# Altium PCB PCB1.PcbDoc
Units mm, origin at the board's own origin, x right, y up, seen from the top; angles counter-clockwise.
Board outline 25 x 60 mm, 2 copper layers (Top Layer, Bottom Layer), stack 1.071 mm thick; 45 components, 58 nets, 174 pads, 420 vias.
Unrouted connection lines stored in the file: 2.
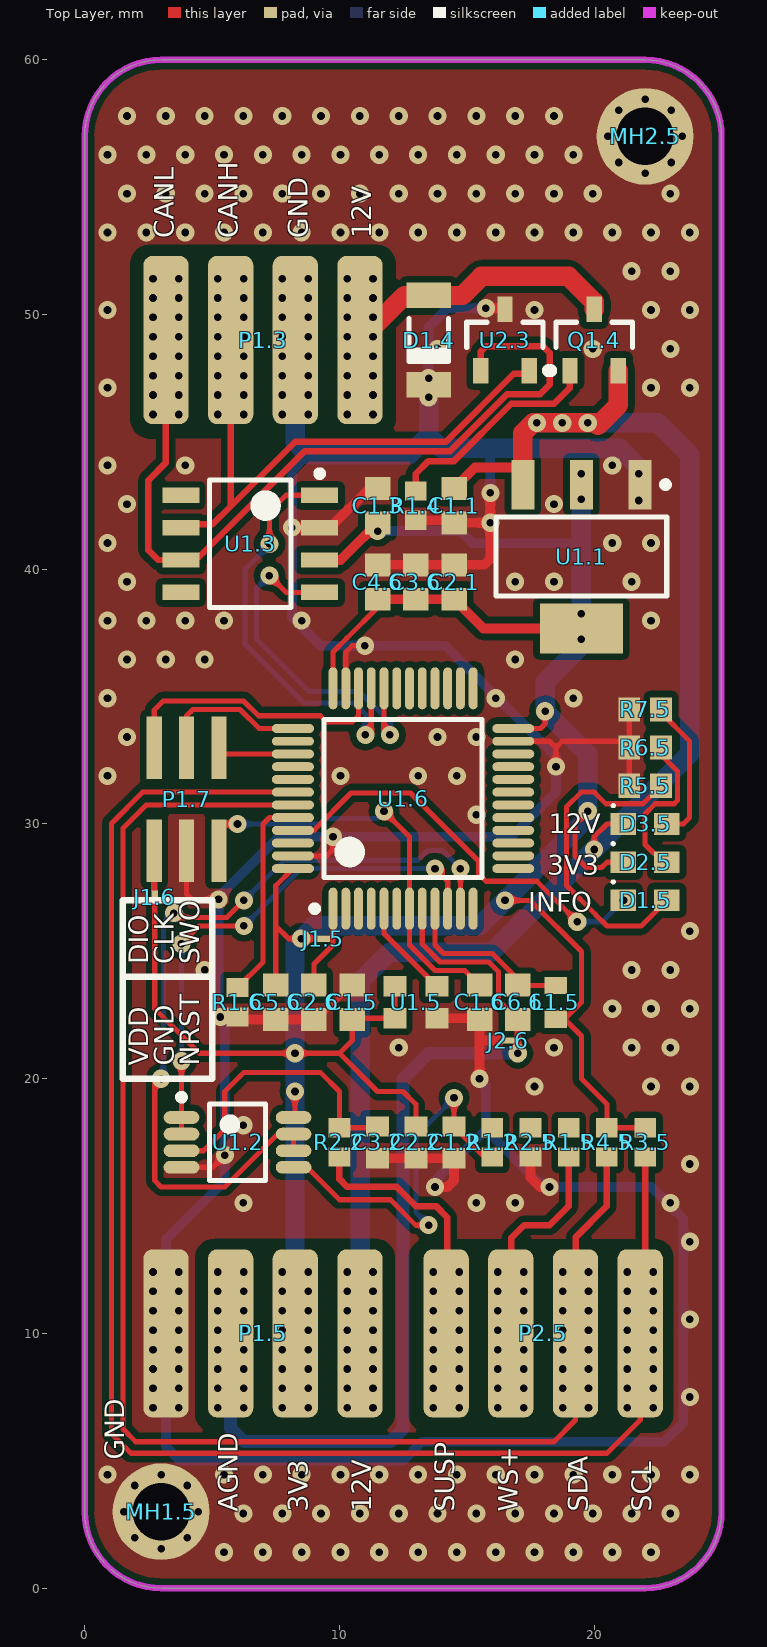
[diagram p0: Top Layer view]
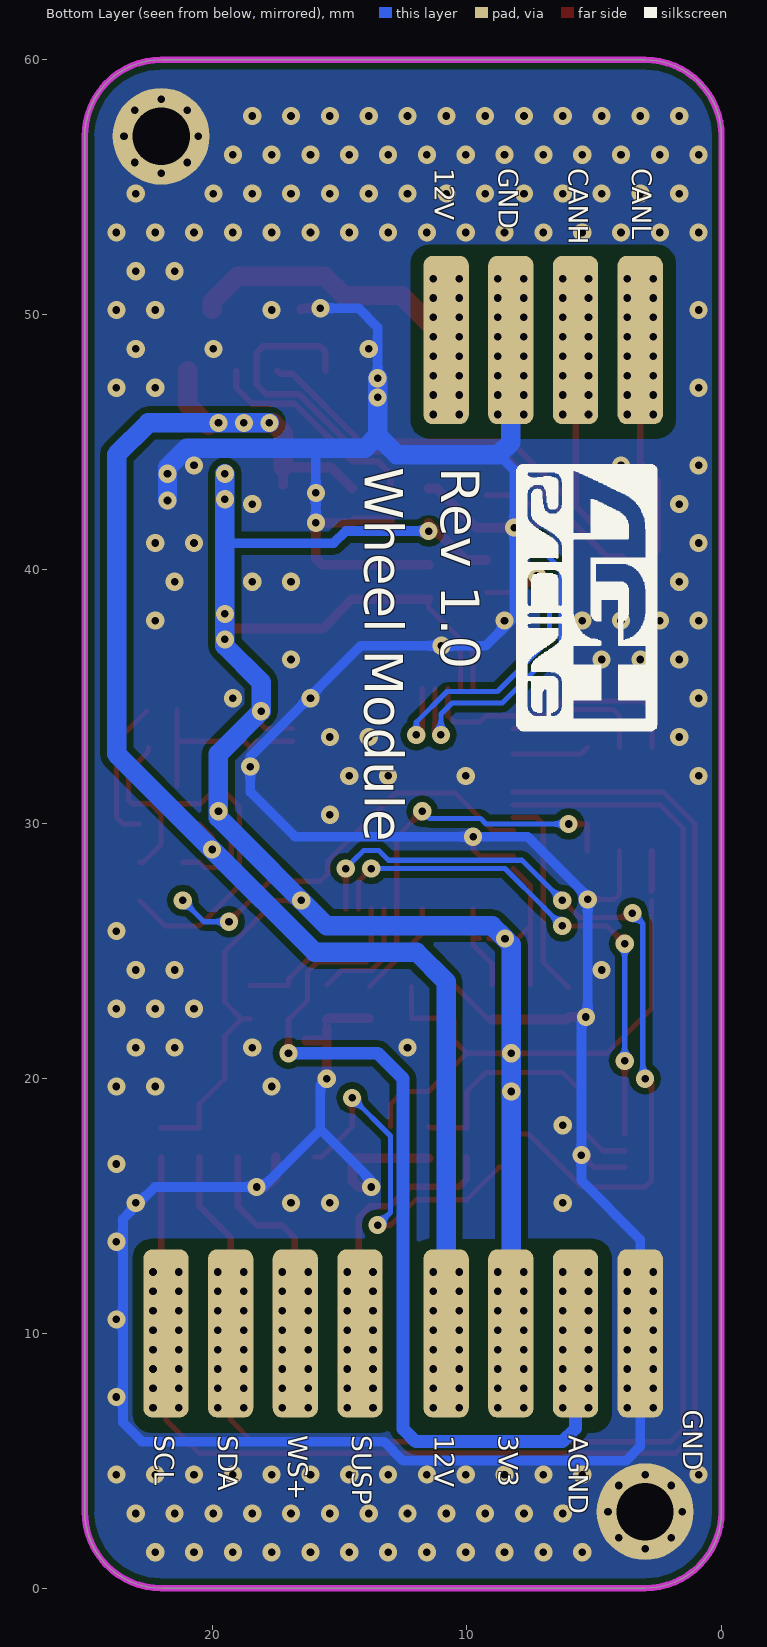
[diagram p1: Bottom Layer view, seen from below]

## Layer stack, top to bottom
Top Solder: solder mask 0.0102, Solder Resist, Dk 3.5
Top Layer: signal copper 0.0356
Dielectric 1: dielectric 1, FR-4, Dk 4.8
Bottom Layer: signal copper 0.0356
Bottom Solder: solder mask 0.0102, Solder Resist, Dk 3.5

## Board outline
0,3 0,57 cw(c3,57) 3,60 22,60 cw(c22,57) 25,57 25,3 cw(c22,3) 22,0 3,0 cw(c3,3)

## Design rules (kind name [scope] priority, off if disabled: settings)
Clearance [All] p1: gap=0.254 ignorepadtopadclearanceinfootprint=FALSE except(0: Arc-Hole Track-Hole SMDPad-Hole THPad-Hole Via-Hole Fill-Hole Poly-Hole Region-Hole Text-Hole; 0.127: Arc-Arc Arc-Track Arc-SMDPad Track-Track Track-SMDPad SMDPad-SMDPad)
MinimumSolderMaskSliver [All] p1: minsoldermaskwidth=0.178
PolygonConnect [Not (HasFootprint('MOUNTING HOLE 2mm') or HasFootprint('MOUNTING HOLE 3mm') or IsVia)] p1: connectstyle=Direct reliefconductorwidth=0.254 reliefentries=4 polygonreliefangle="90 Angle" airgapwidth=0.254
PolygonConnect PolygonConnect_Via [IsVia] p2: connectstyle=Direct reliefconductorwidth=0.254 reliefentries=4 polygonreliefangle="90 Angle" airgapwidth=0.254
PolygonConnect PolygonConnect_MH [HasFootprint('MOUNTING HOLE 2mm') or HasFootprint('MOUNTING HOLE 3mm')] p3: connectstyle=Direct reliefconductorwidth=0.254 reliefentries=4 polygonreliefangle="90 Angle" airgapwidth=0.254
RoutingVias [All] p1: holewidth=0.711 width=1.27 viastyle="Through Hole" minholewidth=0.711 minwidth=1.27 maxholewidth=0.711 maxwidth=1.27 useviatemplates=TRUE viatemplateguid#1={EA7F9BFE-1447-44E4-8BA2-E024834966B7} viatemplateguid#2={962B0548-01BA-4372-896D-C7EEA2AE57FF} viatemplateguid#3={9189B235-EEB6-45A3-9B67-93E09FAE2D0F} viatemplateguid#4={5D0A9815-DD85-4F1D-8D04-4794055170EA} viatemplateguid#5={E4E99652-BE81-42BB-9E36-7D36F875079A} viatemplatename#1=v71h30m0mx0 viatemplatename#2=v71h30m71 viatemplatename#3=v71h30m71 viatemplatename#4=v102h50m0mx0 viatemplatename#5=v127h70
SilkToSilkClearance [All] p1: silktosilkclearance=0.178
SolderMaskExpansion [All] p1: expansion=0.127
Width Width_POWER [InNetClass('POWER')] p1: maxlimit=0.762 minlimit=0.203 preferedwidth=0.381 minimp=50.000000 maximp=50.000000 favimp=50.000000
Width [Not InNetClass('POWER')] p2: maxlimit=0.508 minlimit=0.203 preferedwidth=0.254 minimp=50.000000 maximp=50.000000 favimp=50.000000
28 further rules are at their usual default settings.

## Classes and differential pairs
component class Main: C1.5 D1.5 D2.5 D3.5 J1.5 L1.5 MH1.5 MH2.5 P1.5 P2.5 R1.5 R2.5 R3.5 R4.5 R5.5 R6.5 R7.5 U1.5
component class "U_3V3 LD1117S33TR": C1.1 C2.1 U1.1
component class "U_Analog Input": C1.2 C2.2 C3.2 R1.2 R2.2 U1.2
component class "U_CAN Transceiver SN65HVD232D": C1.3 P1.3 U1.3 U2.3
component class "U_Input Protection": D1.4 Q1.4 R1.4
component class U_STM32F303CCT6: C1.6 C2.6 C3.6 C4.6 C5.6 C6.6 J1.6 J2.6 R1.6 U1.6
component class "U_SWD Connector": P1.7
net class PA[0..10]: PA0 PA1 PA2 PA3 PA4 PA5 PA6 PA7 PA8 PA9 PA10
net class PB[0..15]: PB0 PB1 PB2 PB4 PB5 PB6 PB7 PB8 PB9 PB10 PB11 PB12 PB13 PB14 PB15
net class PC[13..15]: PC13 PC14 PC15
net class POWER: GND VCC VCC_SAFE VDD

## Components (designator, comment, footprint, x,y, rotation, side; value= is the part's Value field where it differs from the comment)
C1.1 "Cap" CAP_0603_IPC_MD 14.5,42.5 r90 top value=10uF (schematic designator C1)
C1.2 "Cap" CAP_0603_IPC_HD 14.5,17.5 r90 top value=33n (schematic designator C1)
C1.3 "Cap" CAP_0603_IPC_MD 11.5,42.5 r270 top value=100nF (schematic designator C1)
C1.5 "Cap" CAP_0603_IPC_MD 10.5,23 r270 top value=100nF (schematic designator C1)
C1.6 "Cap" CAP_0603_IPC_MD 15.5,23 r90 top value=100nF (schematic designator C1)
C2.1 "Cap" CAP_0603_IPC_MD 14.5,39.5 r270 top value=10uF (schematic designator C2)
C2.2 "Cap" CAP_0603_IPC_HD 13,17.5 r90 top value=100nF (schematic designator C2)
C2.6 "Cap" CAP_0603_IPC_MD 9,23 r90 top value=100nF (schematic designator C2)
C3.2 "Cap" CAP_0603_IPC_HD 11.5,17.5 r90 top value=33n (schematic designator C3)
C3.6 "Cap" CAP_0603_IPC_MD 13,39.5 r270 top value=100nF (schematic designator C3)
C4.6 "Cap" CAP_0603_IPC_MD 11.5,39.5 r270 top value=100nF (schematic designator C4)
C5.6 "Cap" CAP_0603_IPC_MD 7.5,23 r90 top value=100nF (schematic designator C5)
C6.6 "Cap" CAP_0603_IPC_MD 17,23 r90 top value=100nF (schematic designator C6)
D1.4 "TGL34-20CA" DIO_MELF_IPC_MD 13.5,49 r90 top (schematic designator D1)
D1.5 "LED GREEN" LED_0603_GREEN_IPC_MD 22,27 r0 top (schematic designator D1)
D2.5 "LED RED" LED_0603_RED_IPC_MD 22,28.5 r0 top (schematic designator D2)
D3.5 "LED YELLOW" LED_0603_YELLOW_IPC_MD 22,30 r0 top (schematic designator D3)
J1.5 "NetTie" NETTIE 9.373,25.5 r0 top net-tie (schematic designator J1)
J1.6 "NetTie" NETTIE 2.75,27.127 r90 top net-tie (schematic designator J1)
J2.6 "NetTie" NETTIE 16.623,21.5 r180 top net-tie (schematic designator J2)
L1.5 "Ind" IND_0603_IPC_HD 18.5,23 r90 top value=10uH (schematic designator L1)
MH1.5 "Mounting Hole 2mm" "MOUNTING HOLE 2mm" 3,3 r90 top (schematic designator MH1)
MH2.5 "Mounting Hole 2mm" "MOUNTING HOLE 2mm" 22,57 r90 top (schematic designator MH2)
P1.3 "CAN" WIRE_PADS_4 7,49 r180 top (schematic designator P1)
P1.5 "SUPPLY" WIRE_PADS_4 7,10 r180 top (schematic designator P1)
P1.7 "SWD" HEADER_2x3_1_27_MALE_SMD 2.73,28.95 r90 top (schematic designator P1)
P2.5 "SENSORS" WIRE_PADS_4 18,10 r180 top (schematic designator P2)
Q1.4 "ZXMP3A13FTA" SOT23_IPC_MD#1 20,49 r90 top (schematic designator Q1)
R1.2 "Res" RES_0603_IPC_HD 16,17.5 r90 top value=10k (schematic designator R1)
R1.4 "Res" RES_0603_IPC_HD 13,42.5 r270 top value=1k (schematic designator R1)
R1.5 "Res" RES_0603_IPC_HD 19,17.5 r90 top value=4.7k (schematic designator R1)
R1.6 "Res" RES_0603_IPC_HD 6,23 r90 top value=10k (schematic designator R1)
R2.2 "Res" RES_0603_IPC_HD 10,17.5 r270 top value=10k (schematic designator R2)
R2.5 "Res" RES_0603_IPC_HD 17.5,17.5 r90 top value=1k (schematic designator R2)
R3.5 "Res" RES_0603_IPC_HD 22,17.5 r90 top value=10k (schematic designator R3)
R4.5 "Res" RES_0603_IPC_HD 20.5,17.5 r90 top value=10k (schematic designator R4)
R5.5 "Res" RES_0603_IPC_MD 22,31.5 r0 top value=470 (schematic designator R5)
R6.5 "Res" RES_0603_IPC_MD 22,33 r0 top value=470 (schematic designator R6)
R7.5 "Res" RES_0603_IPC_MD 22,34.5 r0 top value=4.7k (schematic designator R7)
U1.1 "LD1117S33TR" SOT223_IPC_HD 19.5,40.5 r270 top (schematic designator U1)
U1.2 "MCP6432-E/MS" MSOP8_IPC_MD 6,17.5 r0 top (schematic designator U1)
U1.3 "SN65HVD232D" SOIC_8_IPC_MD 6.5,41 r180 top (schematic designator U1)
U1.5 "16.00M-IQXO-791" ICLCX18 13,23 r0 top (schematic designator U1)
U1.6 "STM32F303CCT6" LQFP48_IPC_LD 12.5,31 r90 top (schematic designator U1)
U2.3 "ESDCAN02-2BWY" SOT23_IPC_MD#2 16.5,49 r90 top (schematic designator U2)

## Footprints (in the part's own frame and the unit in brackets; to place one, negate y for a bottom-side part, rotate by r counter-clockwise, add the part's x,y. Pads: shape width x height; smd on the part's side, far side on the other; paste and mask are expansions set on the pad)
CAP_0603_IPC_HD [mm] "Chip Capacitor, 2-Leads, Body 1,60x0,80mm, IPC High Density"
  rect 0.8x0.9 smd: 1(-0.625,0) 2(0.625,0)
  body extent -0.87,-0.48 0.87,0.48, height 0.95
CAP_0603_IPC_MD [mm] "Chip Capacitor, 2-Leads, Body 1,60x0,80mm, IPC Medium Density"
  rect 0.9x1 smd: 1(-0.675,0) 2(0.675,0)
  body extent -0.87,-0.48 0.87,0.48, height 0.95
DIO_MELF_IPC_MD [mm] "MELF Diode, 2-Leads, Body 3.50x1.53mm, IPC MD"
  rect 1x1.75 smd: 1(-1.75,0) 2(1.75,0)
  silkscreen extent -0.85,-0.77 0.85,0.78, body extent -1.75,-0.76 1.75,0.76, height 1.53
HEADER_2x3_1_27_MALE_SMD [mm]
  rect 2.45x0.6 smd: 1(0,0) 2(4.05,0) 3(0,-1.27) 4(4.05,-1.27) 5(0,-2.54) 6(4.05,-2.54)
  body extent -0.73,-3.17 4.78,0.64, height 6.4
ICLCX18 [mm]
  rect 0.9x0.8 smd: 1(-0.825,-0.625) 2(0.825,-0.625) 3(0.825,0.625) 4(-0.825,0.625)
  body extent -1.25,-1 1.25,1, height 0.8
IND_0603_IPC_HD [mm] "Chip Inductor, 2-Leads, Body 1.60x0.80mm, IPC High Density"
  rect 0.68x0.88 smd: 1(-0.66,0) 2(0.66,0)
  body extent -0.9,-0.48 0.9,0.48, height 0.95
LED_0603_GREEN_IPC_MD [mm] "Molded Diode, 2-Leads, Body 1,60x0,80mm, IPC Medium Density"
  rect 1x0.85 smd: 1(-0.85,0) 2(0.85,0)
  silkscreen extent -1.3,0.68 -1.2,0.77, body extent -0.8,-0.39 0.8,0.39, height 0.7
LED_0603_RED_IPC_MD [mm] "Molded Diode, 2-Leads, Body 1,60x0,80mm, IPC Medium Density"
  rect 1x0.85 smd: 1(-0.85,0) 2(0.85,0)
  silkscreen extent -1.3,0.68 -1.2,0.77, body extent -0.8,-0.39 0.8,0.39, height 0.7
LED_0603_YELLOW_IPC_MD [mm] "Molded Diode, 2-Leads, Body 1,60x0,80mm, IPC Medium Density"
  rect 1x0.85 smd: 1(-0.85,0) 2(0.85,0)
  silkscreen extent -1.3,0.68 -1.2,0.77, body extent -0.8,-0.39 0.8,0.39, height 0.7
LQFP48_IPC_LD [mm] "TSQFP, 48-Leads, Body 7.00x7.00mm, Pitch 0.50mm, IPC Low Density"
  oval 1.65x0.35 smd: 1(-4.325,2.75) 2(-4.325,2.25) 3(-4.325,1.75) 4(-4.325,1.25) 5(-4.325,0.75) 6(-4.325,0.25) 7(-4.325,-0.25) 8(-4.325,-0.75) 9(-4.325,-1.25) 10(-4.325,-1.75) 11(-4.325,-2.25) 12(-4.325,-2.75) 25(4.325,-2.75) 26(4.325,-2.25) 27(4.325,-1.75) 28(4.325,-1.25) 29(4.325,-0.75) 30(4.325,-0.25) 31(4.325,0.25) 32(4.325,0.75) 33(4.325,1.25) 34(4.325,1.75) 35(4.325,2.25) 36(4.325,2.75)
  oval 0.35x1.65 smd: 13(-2.75,-4.325) 14(-2.25,-4.325) 15(-1.75,-4.325) 16(-1.25,-4.325) 17(-0.75,-4.325) 18(-0.25,-4.325) 19(0.25,-4.325) 20(0.75,-4.325) 21(1.25,-4.325) 22(1.75,-4.325) 23(2.25,-4.325) 24(2.75,-4.325) 37(2.75,4.325) 38(2.25,4.325) 39(1.75,4.325) 40(1.25,4.325) 41(0.75,4.325) 42(0.25,4.325) 43(-0.25,4.325) 44(-0.75,4.325) 45(-1.25,4.325) 46(-1.75,4.325) 47(-2.25,4.325) 48(-2.75,4.325)
  silkscreen extent -4.45,-3.1 3.1,3.6, body extent -4.5,-4.5 4.5,4.5, height 1.6
"MOUNTING HOLE 2mm" [mm]
  round 3.8 hole 2.25 paste+0 mask+0: MOUNTING(0,0)
MSOP8_IPC_MD [mm] "TSOP, 8-Leads, Body 3.00x3.00mm, Pitch 0.65mm, IPC Medium Density"
  oval 1.4x0.5 smd: 1(-2.2,0.975) 2(-2.2,0.325) 3(-2.2,-0.325) 4(-2.2,-0.975) 5(2.2,-0.975) 6(2.2,-0.325) 7(2.2,0.325) 8(2.2,0.975)
  silkscreen extent -2.32,-1.5 1.1,1.9, body extent -2.45,-1.5 2.45,1.5, height 1.1
NETTIE [mil]
  rect 10x10 smd paste+0 mask+0: 1(-5,0) 2(5,0)
RES_0603_IPC_HD [mm] "Chip Resistor, 2-Leads, Body 1,55x0,80mm, IPC High Density"
  rect 0.75x0.85 smd: 1(-0.575,0) 2(0.575,0)
  body extent -0.85,-0.48 0.85,0.48, height 0.55
RES_0603_IPC_MD [mm] "Chip Resistor, 2-Leads, Body 1,55x0,80mm, IPC Medium Density"
  rect 0.85x0.95 smd: 1(-0.625,0) 2(0.625,0)
  body extent -0.85,-0.48 0.85,0.48, height 0.55
SOIC_8_IPC_MD [mm] "SOIC, 8-Leads, Pitch 1,27mm, IPC Medium Density"
  rect 1.45x0.6 smd: 1(-2.725,-1.905) 2(-2.725,-0.635) 3(-2.725,0.635) 4(-2.725,1.905) 5(2.725,1.905) 6(2.725,0.635) 7(2.725,-0.635) 8(2.725,-1.905)
  silkscreen extent -2.85,-2.88 1.6,2.5, body extent -3,-2.5 3,2.5, height 1.75
SOT23_IPC_MD#1 [mm] "SOT23, 3-Leads, Body 2.90x2.45mm, Pitch 0.95mm, IPC Medium Density"
  rect 1x0.6 smd: 1(-1.2,0.95) 2(-1.2,-0.95) 3(1.2,0)
  silkscreen extent -1.32,-1.5 0.7,1.92, body extent -1.3,-1.5 1.3,1.5, height 1.1
SOT23_IPC_MD#2 [mm] "SOT23, 3-Leads, Body 2.90x2.45mm, Pitch 0.95mm, IPC Medium Density"
  rect 1x0.6 smd: 1(-1.2,-0.95) 2(-1.2,0.95) 3(1.2,0)
  silkscreen extent -1.32,-1.93 0.7,1.5, body extent -1.3,-1.5 1.3,1.5, height 1.1
SOT223_IPC_HD [mm] "SOT223, 4-Leads, Body 6.50x7.00mm (avg), Pitch 2.30mm, IPC High Density"
  rect 1.95x0.9 smd: 1(-2.825,2.3) 2(-2.825,0) 3(-2.825,-2.3)
  rect 1.95x3.25 smd: 4(2.825,0)
  silkscreen extent -2.95,-3.35 1.55,3.43, body extent -3.5,-3.35 3.5,3.35, height 1.8
WIRE_PADS_4 [mil] "Wire Pads 2 Footprint"
  rrect40% 70x260 smd: 1(-150,0) 2(-50,0) 3(50,0) 4(150,0)
  rrect40% 70x260 smd far side: 1(-150,0) 2(-50,0) 3(50,0) 4(150,0)

## Part data
C1.1 C1.2 C1.3 C1.5 C1.6 C2.1 C2.2 C2.6 C3.2 C3.6 C4.6 C5.6 C6.6: "Capacitor"
D1.4: "Transil"
L1.5: "Inductor"
MH1.5 MH2.5: library part "Mounting Hole"
P1.3 P1.5 P2.5: library part "Header 4", "Header, 4-Pin"
P1.7: library part "Header 6", "Header, 6-Pin"
Q1.4: "P-mosfet"
R1.2 R1.4 R1.5 R1.6 R2.2 R2.5 R3.5 R4.5 R5.5 R6.5 R7.5: "Resistor"
U1.3: "3.3V CAN Transceiver with Standby Mode, 17 mA, -40 to 85 degC, 8-pin SOIC (D), Green (RoHS & no Sb/Br)", Manufacturer="Texas Instruments", Manufacturer Part Number=SN65HVD232D, Mounting Technology=SMD, Part Number=SN65HVD232D, Supplier=TME, Supplier Part Number=SN65HVD232D, Type=IC
U1.5: "Crystal Clock Oscillator", Manufacturer="IQD FREQUENCY PRODUCTS", MPN=LFSPXO066657CUTT, Name=16.00M-IQXO-791, SPN=16.00M-IQXO-791, Supplier=TME
U1.6: "ARM Cortex-M4 32-bit MCU, 256 KB Flash, 40 KB Internal RAM, 37 I/Os, 48-pin LQFP, -40 to 85 degC, Tray", I/Os (High Current)=37, Operating Frequency(F) (Processor speed) (MHz)=72, Supplier Part Number 1=497-13318-ND, Supply Voltage(Vcc) min (V)=2, ComponentLink1Description="Manufacturer URL", ComponentLink1URL=http://www.st.com/web/en/home.html, ComponentLink2Description=Datasheet, ComponentLink2URL=http://www.st.com/st-web-ui/static/active/en/resource/technical/document/datasheet/DM00058181.pdf, ComponentLink3Description="Package Specification", ComponentLink3URL=http://www.st.com/st-web-ui/static/active/en/resource/technical/document/datasheet/DM00058181.pdf, Core="ARM Cortex-M4", D/A Converter="2x12-bit (2 Channel)", DatasheetVersion="Rev. 6", FLASH Size (Prog) (kB)=256, Internal RAM Size (kB)=40, Mounting Technology="Surface Mount", PackageDescription="48-Pin Low Profile Quad Flat Package, 7 x 7 mm Body, 0.5 mm Pitch", PackageReference=LQFP48, PackageVersion="Rev. 6, 06/2013", Packing=Tray, PartNumber=STM32F303CCT6, Supplier 1=Digi-Key, Supplier 2=Newark, Supplier 3=Newark, Supplier 4=Mouser, Supplier Part Number 2=46W2192, Supplier Part Number 3=66W7286, Supplier Part Number 4=511-STM32F303CCT6
U2.3: "ESD CAN protection (2 transils)"

## Via types
v1: diameter 0.711, hole 0.3, Top Layer to Bottom Layer, tented both sides, 212 vias
v2: diameter 0.711, hole 0.3, Top Layer to Bottom Layer, 208 vias

## Nets (pads, with @x,y where several pads share a name; then routed paths per layer and width w, separated by ;. In a path a pad name is that pad's centre, name@x,y a point inside that pad or via, vN(x,y) a via of type N, cw(c..) or ccw(c..) an arc to the next point about the centre after c; other vN are vias at no path point)
AGND: C6.6.1 J2.6.1 P1.5.3 U1.6.8 | length 39.6
  Top Layer w0.203: U1.6.8 13.25,25.283 13.949,24.584 15.864,24.584 16.25,24.198 16.25,23.075 C6.6.1
  Top Layer w0.254: v1(17,21) C6.6.1
  Bottom Layer w0.508: P1.5.3@5.73,11.651 5.73,10 5.73,6.27 6.25,5.75 12,5.75 12.5,6.25 12.5,20 13.5,21 v1(17,21)
  other v2: 5.222,7.079 6.238,7.079 5.222,7.841 6.238,7.841 5.222,8.603 6.238,8.603 5.222,9.365 6.238,9.365 5.222,10.127 6.238,10.127 5.222,10.889 6.238,10.889 5.222,11.651 6.238,11.651 5.222,12.413 6.238,12.413
CAN_RX: U1.3.4 U1.6.32 | length 13.9
  Top Layer w0.203: v1(7.25,39.75) 7.905,39.095 U1.3.4 ; U1.6.32 11.75,33.733 v1(11.983,33.5)
  Bottom Layer w0.203: v1(7.25,39.75) 6.75,39.25 6.75,37.25 8.797,35.203 10.773,35.203 11.983,33.993 v1(11.983,33.5)
CAN_TX: U1.3.1 U1.6.33 | length 16.4
  Top Layer w0.203: v1(7.25,41) 7.25,42.25 7.905,42.905 U1.3.1 ; v1(11.017,33.5) 11.25,33.733 U1.6.33
  Bottom Layer w0.203: v1(7.25,41) 7.25,40.953 6.297,40 6.297,37.062 8.609,34.75 10.585,34.75 11.017,34.318 v1(11.017,33.5)
CANH: P1.3.3 U1.3.7 U2.3.1 | length 22.7
  Top Layer w0.254: U1.3.7 3.902,41.762 5.012,41.762 5.73,42.48 ; P1.3.3@5.73,49 5.73,42.48 ; U2.3.1 17.323,47.673 16.845,47.673 14.184,45.012 8.262,45.012 5.73,42.48
  other v2: 5.222,46.079 6.238,46.079 5.222,46.841 6.238,46.841 5.222,47.603 6.238,47.603 5.222,48.365 6.238,48.365 5.222,49.127 6.238,49.127 5.222,49.889 6.238,49.889 5.222,50.651 6.238,50.651 5.222,51.413 6.238,51.413
CANL: P1.3.4 U1.3.6 U2.3.2 | length 32.2
  Top Layer w0.254: P1.3.4@3.19,49 3.19,44.19 2.5,43.5 2.5,40.75 2.885,40.365 U1.3.6 3.902,40.492 4.492,40.492 8.631,44.631 14.342,44.631 16.592,46.881 17.881,46.881 18.25,47.25 18.25,48.5 18,48.75 15.75,48.75 15.55,48.55 U2.3.2
  other v2: 2.682,46.079 3.698,46.079 2.682,46.841 3.698,46.841 2.682,47.603 3.698,47.603 2.682,48.365 3.698,48.365 2.682,49.127 3.698,49.127 2.682,49.889 3.698,49.889 2.682,50.651 3.698,50.651 2.682,51.413 3.698,51.413
GND: C1.1.1 C1.2.1 C1.3.1 C1.5.1 C1.6.1 C2.1.1 C2.2.1 C2.6.1 C3.2.1 C3.6.1 C4.6.1 C5.6.1 D1.4.1 J2.6.2 MH1.5.MOUNTING MH2.5.MOUNTING P1.3.2 P1.5.4 P1.7.3 R1.4.2 R1.6.1 R2.5.1 R5.5.1 R6.5.1 R7.5.1 U1.1.1 U1.2.4 U1.3.2 U1.5.2 U1.6.23 U1.6.35 U1.6.47 U2.3.3 | length 181.2
  Top Layer w0.203: U1.2.4 5.025,16.525 v1(5.5,17) ; P1.7.3 4,27.25 4.122,27.128 4.209,27.041 v1(5.25,27.041) ; U1.6.47 9.5,28.75 9.75,29 v1(9.75,29.5) ; C2.6.1 9.15,22.325 C1.5.1 ; U1.6.35 10.25,36.75 10.5,37 v1(11,37) ; C1.6.1@15.5,21.987 C1.6.1 ; U1.6.23 18.25,33.25 18.5,33 ; v1(18.5,32.25) 18.5,33 ; R5.5.1 R6.5.1 R6.5.1@21.375,33.25 ; R7.5.1 R6.5.1@21.375,33.25 ; 18.5,33 18.75,33.25 R6.5.1@21.375,33.25
  Top Layer w0.381: v1(5.325,22.425) R1.6.1 6.1,22.325 C5.6.1 C2.6.1 ; v1(8.135,41.635) U1.3.2 9.635,41.635 11.175,43.175 C1.3.1 ; C3.2.1 C2.2.1 C1.2.1 14.5,16 14.25,15.75 v1(13.75,15.75) ; C4.6.1 C3.6.1 C2.1.1 15.675,40.175 15.925,40.425 v1(15.925,41.825) ; R1.4.2 14.4,41.925 C1.1.1 v1(15.925,41.825) ; U1.5.2 15.45,22.375 C1.6.1 ; v1(15.5,20) 15.5,21.5 ; C1.6.1@15.5,21.987 15.5,21.5 ; v1(15.75,50.25) 16.45,50.25 U2.3.3 ; v1(15.925,43) v1(15.925,41.825) ; 16.305,21.5 15.5,21.5 ; R2.5.1 17.5,16.125 17.875,15.75 v1(18.25,15.75)
  Bottom Layer w0.381: 8.75,44.5 8.135,43.885 v1(8.135,41.635) 8.135,38.115 9.25,37 v1(11,37) 14.15,37 18.5,32.65 v1(18.5,32.25) 18.5,31.25 16.75,29.5 v1(9.75,29.5) 7.618,29.5 5.25,27.132 v1(5.25,27.041) 5.25,22.5 v1(5.325,22.425) 5.5,22.25 v1(5.5,17) 5.5,16 3.19,13.69 3.19,10 3.19,8.603 3.19,5.56 3.75,5 12.5,5 13.25,5.75 22.75,5.75 23.5,6.5 23.5,14.5 22.25,15.75 v1(18.25,15.75) 18,15.75 15.75,18 ; v1(13.5,47.5) 13.5,49.5 14.25,50.25 v1(15.75,50.25) ; v1(13.75,15.75) 13.75,16 15.75,18 ; v1(15.5,20) 15.75,19.75 15.75,18 ; v1(15.925,41.825) v1(15.925,43) 15.925,44.675 16,44.75
  Bottom Layer w0.762: P1.3.2@8.27,49 8.27,47.603 8.27,44.98 8.75,44.5 12.75,44.5 13.5,45.25 ; v1(13.5,47.5) v1(13.5,46.75) 13.5,45.25 ; v1(21.75,42.7) v1(21.75,43.75) 21.75,44 21,44.75 16,44.75 14,44.75 13.5,45.25
  other v1: 5.469,1.409 6.993,1.409 8.517,1.409 10.041,1.409 11.565,1.409 13.089,1.409 14.613,1.409 16.137,1.409 17.661,1.409 19.185,1.409 20.709,1.409 22.233,1.409 6.231,2.933 7.755,2.933 9.279,2.933 10.803,2.933 12.327,2.933 13.851,2.933 15.375,2.933 16.899,2.933 18.423,2.933 19.947,2.933 21.471,2.933 22.995,2.933 0.897,4.457 5.469,4.457 6.993,4.457 8.517,4.457 10.041,4.457 11.565,4.457 13.089,4.457 14.613,4.457 16.137,4.457 17.661,4.457 19.185,4.457 20.709,4.457 22.233,4.457 23.757,4.457 23.757,7.505 23.757,10.553 23.757,13.601 6.231,15.125 15.375,15.125 16.899,15.125 22.995,15.125 23.757,16.649 6.231,18.173 17.661,19.697 22.233,19.697 23.757,19.697 12.327,21.221 18.423,21.221 21.471,21.221 22.995,21.221 20.709,22.745 22.233,22.745 23.757,22.745 4.707,24.269 21.471,24.269 22.995,24.269 23.757,25.793 15.375,30.365 0.897,31.889 10.041,31.889 13.089,31.889 14.613,31.889 1.659,33.413 13.851,33.413 15.375,33.413 0.897,34.937 16.137,34.937 19.185,34.937 1.659,36.461 3.183,36.461 4.707,36.461 16.899,36.461 0.897,37.985 2.421,37.985 3.945,37.985 5.469,37.985 8.517,37.985 22.233,37.985 1.659,39.509 16.899,39.509 18.423,39.509 21.471,39.509 0.897,41.033 20.709,41.033 22.233,41.033 1.659,42.557 18.423,42.557 0.897,44.081 3.945,44.081 20.709,44.081 0.897,47.129 22.233,47.129 23.757,47.129 13.851,48.653 19.947,48.653 22.995,48.653 0.897,50.177 17.661,50.177 22.233,50.177 23.757,50.177 21.471,51.701 22.995,51.701 0.897,53.225 2.421,53.225 3.945,53.225 5.469,53.225 6.993,53.225 8.517,53.225 10.041,53.225 11.565,53.225 13.089,53.225 14.613,53.225 16.137,53.225 17.661,53.225 19.185,53.225 20.709,53.225 22.233,53.225 23.757,53.225 1.659,54.749 3.183,54.749 4.707,54.749 6.231,54.749 7.755,54.749 9.279,54.749 10.803,54.749 12.327,54.749 13.851,54.749 15.375,54.749 16.899,54.749 18.423,54.749 19.947,54.749 22.995,54.749 0.897,56.273 2.421,56.273 3.945,56.273 5.469,56.273 6.993,56.273 8.517,56.273 10.041,56.273 11.565,56.273 13.089,56.273 14.613,56.273 16.137,56.273 17.661,56.273 19.185,56.273 1.659,57.797 3.183,57.797 4.707,57.797 6.231,57.797 7.755,57.797 9.279,57.797 10.803,57.797 12.327,57.797 13.851,57.797 15.375,57.797 16.899,57.797 18.423,57.797
  other v2: 3,1.545 1.971,1.971 4.029,1.971 1.545,3 4.455,3 1.971,4.029 4.029,4.029 3,4.455 2.682,7.079 3.698,7.079 2.682,7.841 3.698,7.841 2.682,8.603 3.698,8.603 2.682,9.365 3.698,9.365 2.682,10.127 3.698,10.127 2.682,10.889 3.698,10.889 2.682,11.651 3.698,11.651 2.682,12.413 3.698,12.413 7.762,46.079 8.778,46.079 7.762,46.841 8.778,46.841 7.762,47.603 8.778,47.603 7.762,48.365 8.778,48.365 7.762,49.127 8.778,49.127 7.762,49.889 8.778,49.889 7.762,50.651 8.778,50.651 7.762,51.413 8.778,51.413 22,55.545 20.971,55.971 23.029,55.971 20.545,57 23.455,57 20.971,58.029 23.029,58.029 22,58.455
NetC1.2_2: C1.2.2 R1.2.1 U1.2.5 | length 15.2
  Top Layer w0.203: U1.2.5 8.725,16.525 10,15.25 12,15.25 13,14.25 v1(13.5,14.25) ; v1(14.5,19.25) C1.2.2 15.7,16.925 R1.2.1
  Bottom Layer w0.203: v1(13.5,14.25) 13,14.75 13,17.75 v1(14.5,19.25)
NetC3.2_2: C3.2.2 R2.2.1 U1.2.3 | length 11.6
  Top Layer w0.203: U1.2.3 4.669,17.175 5.5,18.006 5.5,19.5 6.25,20.25 9.25,20.25 10,19.5 R2.2.1 11.45,18.075 C3.2.2
NetD1.5_2: D1.5.2 R5.5.2 | length 12.5
  Top Layer w0.203: R5.5.2 21.921,30.796 20.459,30.796 20.006,31.25 19.494,31.25 18.92,30.676 18.92,27.586 20.047,26.459 20.047,26.453 20.5,26 21.85,26 D1.5.2
NetD2.5_2: D2.5.2 R6.5.2 | length 6.2
  Top Layer w0.203: R6.5.2@22.5,33 22.5,32.848 23.279,32.07 23.279,30.93 23.145,30.796 22.398,30.796 22,30.398 22,29.2 22.7,28.5 D2.5.2
NetD3.5_2: D3.5.2 R7.5.2 | length 5.7
  Top Layer w0.203: R7.5.2@22.562,34.438 23.75,33.25 23.75,30.25 23.5,30 D3.5.2
NetQ1.4_1: Q1.4.1 R1.4.1 | length 8.8
  Top Layer w0.254: R1.4.1 13,43.75 13.5,44.25 14.5,44.25 16.75,46.5 18.425,46.5 19.05,47.125 Q1.4.1
NetR1.2_2: R1.2.2 R1.5.2 R2.5.2
NetR1.6_2: R1.6.2 U1.6.44 | length 8.1
  Top Layer w0.203: R1.6.2 7,24.575 7,30 7.25,30.25 U1.6.44
NRST: C1.6.2 P1.7.5 U1.6.7 | length 16.8
  Top Layer w0.203: P1.7.5 5.27,29.98 5.25,30 v1(6,30) ; v1(11.75,30.5) 12.75,29.5 U1.6.7 12.75,25.25 13.746,24.254 14.921,24.254 C1.6.2
  Bottom Layer w0.203: v1(6,30) 9.244,30 9.455,30.211 11.461,30.211 v1(11.75,30.5)
OSC_IN: U1.5.3 U1.6.5 | length 3.9
  Top Layer w0.203: U1.6.5 11.75,25.7 U1.5.3
OSC_OUT: U1.6.6
PA0: U1.2.1 U1.2.2 U1.6.10 | length 20.6
  Top Layer w0.203: U1.2.2 U1.2.1 v1(3.8,20.7) ; v1(3.8,25.3) 4.5,26 v1(6.25,26) ; v1(13.75,28.25) 14,28.25 14.039,28.211 14.039,27.955 14.25,27.744 U1.6.10
  Bottom Layer w0.203: v1(3.8,20.7) v1(3.8,25.3) ; v1(6.25,26) 6.256,26 6.961,26.705 6.961,26.711 8.5,28.25 v1(13.75,28.25)
PA1: U1.2.6 U1.2.7 U1.6.11 | length 32.2
  Top Layer w0.203: v1(3,20) 2.75,19.75 2.75,16 3,15.75 5.5,15.75 7.575,17.825 U1.2.7 U1.2.6 ; v1(3.5,26.5) 3.67,26.33 5.574,26.33 5.955,26.711 5.961,26.711 v1(6.25,27) ; U1.6.11 v1(14.75,28.25)
  Bottom Layer w0.203: v1(3,20) 3.089,20.089 3.089,26.089 v1(3.5,26.5) ; v1(6.25,27) 7.83,28.58 13.074,28.58 13.455,28.961 14.045,28.961 14.461,28.545 14.461,28.539 v1(14.75,28.25)
PA2: U1.6.12
PA3: U1.6.13
PA4: U1.6.14
PA5: U1.6.15
PA6: U1.6.16
PA7: U1.6.17
PA8: U1.6.29
PA9: U1.6.30
PA10: U1.6.31
PA_15: U1.6.38
PB0: U1.6.18
PB1: U1.6.19
PB2: U1.6.20
PB4: U1.6.40
PB5: U1.6.41
PB6: P2.5.1 R3.5.1 U1.6.42 | length 63.6
  Top Layer w0.203: U1.6.42 2.274,31.25 1.047,30.023 1.047,6.062 1.812,5.297 20.51,5.297 21.81,6.596 P2.5.1@21.81,10
  Top Layer w0.254: P2.5.1@21.81,10 22,10.19 R3.5.1
  other v2: 21.302,7.079 22.318,7.079 21.302,7.841 22.318,7.841 21.302,8.603 22.318,8.603 21.302,9.365 22.318,9.365 21.302,10.127 22.318,10.127 21.302,10.889 22.318,10.889 21.302,11.651 22.318,11.651 21.302,12.413 22.318,12.413
PB7: P2.5.2 R4.5.1 U1.6.43 | length 59.8
  Top Layer w0.203: U1.6.43 2.415,30.75 1.5,29.835 1.5,6.25 2,5.75 18.424,5.75 19.27,6.596 P2.5.2@19.27,10
  Top Layer w0.254: P2.5.2@19.27,10 19.27,13.77 20.5,15 R4.5.1
  other v2: 18.762,7.079 19.778,7.079 18.762,7.841 19.778,7.841 18.762,8.603 19.778,8.603 18.762,9.365 19.778,9.365 18.762,10.127 19.778,10.127 18.762,10.889 19.778,10.889 18.762,11.651 19.778,11.651 18.762,12.413 19.778,12.413
PB8: D1.5.1 U1.6.45 | length 16.3
  Top Layer w0.203: U1.6.45 9,29.75 9.039,29.789 9.039,29.795 10.455,31.211 12.795,31.211 15.461,28.545 15.461,28.039 15.75,27.75 17.75,27.75 v1(19.336,26.164)
  Bottom Layer w0.203: v1(19.336,26.164) 20.314,26.164 v1(21.15,27)
PB9: U1.6.46
PB10: U1.6.21
PB11: U1.6.22
PB12: U1.6.25
PB13: U1.6.26
PB14: U1.6.27
PB15: U1.6.28
PC13: U1.6.2
PC14: U1.6.3
PC15: U1.6.4
SUSP_IN: P2.5.4 R2.2.2 | length 10.3
  Top Layer w0.254: R2.2.2 10,16.06 10.31,15.75 12.25,15.75 13,15 13.792,15 14.237,14.555 14.237,11.651 14.237,10.047 P2.5.4@14.19,10
  other v2: 13.682,7.079 14.698,7.079 13.682,7.841 14.698,7.841 13.682,8.603 14.698,8.603 13.682,9.365 14.698,9.365 13.682,10.127 14.698,10.127 13.682,10.889 14.698,10.889 13.682,11.651 14.698,11.651 13.682,12.413 14.698,12.413
SWCLK: P1.7.4 U1.6.37 | length 5.8
  Top Layer w0.203: P1.7.4 4,34.25 4.25,34.5 6.1,34.5 6.85,33.75 U1.6.37
SWDIO: P1.7.2 U1.6.34 | length 11.2
  Top Layer w0.203: P1.7.2 2.73,34.48 3.08,34.83 6.237,34.83 6.817,34.25 9.25,34.25 9.5,34 10.5,34 10.75,34.25 U1.6.34
SWO: P1.7.6 U1.6.39 | length 3
  Top Layer w0.203: P1.7.6 5.52,32.75 U1.6.39
VBAT: C2.6.2 J1.5.2 U1.6.1 | length 3.6
  Top Layer w0.203: C2.6.2 9,24.5 9.75,25.25 9.75,25.5 ; J1.5.2 9.75,25.5 ; U1.6.1 9.75,25.5
VCC: D1.4.2 P1.3.1 Q1.4.3 | length 10.9
  Top Layer w0.762: P1.3.1@10.81,49 12.56,50.75 D1.4.2 14.825,50.75 15.575,51.5 19,51.5 20,50.5 Q1.4.3
  other v2: 10.302,46.079 11.318,46.079 10.302,46.841 11.318,46.841 10.302,47.603 11.318,47.603 10.302,48.365 11.318,48.365 10.302,49.127 11.318,49.127 10.302,49.889 11.318,49.889 10.302,50.651 11.318,50.651 10.302,51.413 11.318,51.413
VCC_SAFE: C1.1.2 D3.5.1 P1.5.1 Q1.4.2 U1.1.3 | length 61.3
  Top Layer w0.203: v1(20,29) 20,29.5 20.5,30 D3.5.1
  Top Layer w0.381: C1.1.2 15.325,44 17.2,44 U1.1.3
  Top Layer w0.762: U1.1.3@17.2,44 17.2,45.35 17.6,45.75 v1(17.75,45.75) v1(18.75,45.75) v1(19.75,45.75) 20.05,45.75 20.15,45.65 20.95,46.45 Q1.4.2
  Bottom Layer w0.762: P1.5.1@10.81,10 10.81,23.81 11.965,24.965 15.965,24.965 v1(20,29) 23.75,32.75 23.75,44.5 22.5,45.75 v1(19.75,45.75) v1(18.75,45.75) v1(17.75,45.75)
  other v2: 10.302,7.079 11.318,7.079 10.302,7.841 11.318,7.841 10.302,8.603 11.318,8.603 10.302,9.365 11.318,9.365 10.302,10.127 11.318,10.127 10.302,10.889 11.318,10.889 10.302,11.651 11.318,11.651 10.302,12.413 11.318,12.413
VDD: C1.3.2 C1.5.2 C2.1.2 C2.2.2 C3.6.2 C4.6.2 C5.6.2 D2.5.1 J1.5.1 J1.6.1 L1.5.1 P1.5.2 R3.5.2 R4.5.2 U1.1.2 U1.1.4 U1.2.8 U1.3.3 U1.5.1 U1.5.4 U1.6.24 U1.6.36 U1.6.48 | length 119.5
  Top Layer w0.203: J1.6.1 2.75,22.75 4.089,21.411 4.095,21.411 4.506,21 v1(8.255,21) 10,21 ; C5.6.2 7.5,26 ; U1.6.48 7.5,27.575 7.5,26 ; U1.2.8 8.255,18.53 v1(8.255,19.5) ; J1.5.1@9.144,25.5 v1(8.5,25.5) 8,25.5 7.5,26 ; U1.6.36 9.75,36.75 10.289,37.289 10.289,37.295 11.5,38.506 C4.6.2 ; v1(11.5,41.5) C1.3.2 ; U1.5.4 U1.5.1 10.55,22.375 C1.5.2 10.5,21.5 10,21 ; C2.2.2 13,19 12.5,19.5 11.5,19.5 10,21 ; v1(16.5,27) 17.494,27 19.5,24.994 19.5,23 L1.5.1@18.84,22.34 ; U1.6.24 17.9,33.75 18.075,33.925 v1(18.075,34.425) ; L1.5.1 L1.5.1@18.84,22.34 ; v1(19.75,30.5) 19.25,30 19.25,28.744 19.705,28.289 20.295,28.289 20.506,28.5 D2.5.1 ; R3.5.2 R4.5.2 20.5,19 19.5,20 19.5,21.68 L1.5.1@18.84,22.34
  Top Layer w0.381: U1.3.3 10.04,40.365 C1.3.2 ; C4.6.2 C3.6.2 C2.1.2 15.65,37.675 U1.1.4
  Top Layer w0.762: U1.1.4 v1(19.5,38.25)
  Bottom Layer w0.381: P1.5.2@8.27,10 P1.5.2@8.27,11.651 ; v1(11.5,41.5) 14.75,41.5 15.225,41.025 19.5,41.025
  Bottom Layer w0.762: v2(8.778,9.365) v2(8.778,10.127) v2(8.778,10.889) v2(8.778,11.651) v2(8.778,12.413) 8.255,12.936 v1(8.255,19.5) v1(8.255,21) 8.255,25.255 v1(8.5,25.5) 9,26 15.5,26 19.75,30.25 v1(19.75,30.5) 19.75,32.75 v1(18.075,34.425) 18.075,35.575 19.5,37 v1(19.5,37.25) v1(19.5,38.25) 19.5,41.025 v1(19.5,42.75) v1(19.5,43.75)
  other v2: 7.762,7.079 8.778,7.079 7.762,7.841 8.778,7.841 7.762,8.603 8.778,8.603 7.762,9.365 7.762,10.127 7.762,10.889 7.762,11.651 7.762,12.413
VDD_TARGET: J1.6.2 P1.7.1 | length 1.6
  Top Layer w0.254: P1.7.1 2.73,27.401 2.75,27.381
VDDA: C6.6.2 L1.5.2 U1.6.9 | length 7
  Top Layer w0.203: U1.6.9 13.75,25.25 14.086,24.914 16.001,24.914 17,23.915 C6.6.2 17.015,23.66 L1.5.2
WS+: P2.5.3 R1.5.1 | length 8.8
  Top Layer w0.254: P2.5.3@16.5,10.23 16.73,10 16.75,10.02 16.75,13.75 17.25,14.25 18.25,14.25 19,15 R1.5.1
  other v2: 16.222,7.079 17.238,7.079 16.222,7.841 17.238,7.841 16.222,8.603 17.238,8.603 16.222,9.365 17.238,9.365 16.222,10.127 17.238,10.127 16.222,10.889 17.238,10.889 16.222,11.651 17.238,11.651 16.222,12.413 17.238,12.413
pads on no net: U1.3.5 U1.3.8

## Polygon pours and split planes (outlines as drawn)
GND on Top Layer "GND_TOP" (solid, pour order 0): 0,60 25,60 25,0 0,0
GND on Bottom Layer "GND_BOTTOM" (solid, pour order 2): 0,60 25,60 25,0 0,0

## Keep-outs
Keep-Out Layer:
  the board outline again, w0.254

## Other copper
Top Layer:
  pour cut-out: 12.7,12.954 cw(c13.462,12.954) 13.462,13.716 22.352,13.716 cw(c22.352,12.954) 23.114,12.954 23.114,6.858 cw(c22.352,6.858) 22.352,6.096 13.462,6.096 cw(c13.462,6.858) 12.7,6.858
  pour cut-out: 1.793,51.988 cw(c2.555,51.988) 2.555,52.75 11.445,52.75 cw(c11.445,51.988) 12.207,51.988 12.207,45.892 cw(c11.445,45.892) 11.445,45.13 2.555,45.13 cw(c2.555,45.892) 1.793,45.892
  pour cut-out: 4.318,12.954 cw(c5.079,12.955) 5.08,13.716 11.43,13.716 cw(c11.43,12.954) 12.192,12.954 12.192,6.858 cw(c11.43,6.858) 11.43,6.096 5.08,6.096 cw(c5.08,6.858) 4.318,6.858
Bottom Layer:
  pour cut-out: 4.318,12.954 cw(c5.079,12.955) 5.08,13.716 11.43,13.716 cw(c11.43,12.954) 12.192,12.954 12.192,6.858 cw(c11.43,6.858) 11.43,6.096 5.08,6.096 cw(c5.08,6.858) 4.318,6.858
  pour cut-out: 12.7,12.954 cw(c13.462,12.954) 13.462,13.716 22.352,13.716 cw(c22.352,12.954) 23.114,12.954 23.114,6.858 cw(c22.352,6.858) 22.352,6.096 13.462,6.096 cw(c13.462,6.858) 12.7,6.858
  pour cut-out: 1.793,51.988 cw(c2.555,51.988) 2.555,52.75 11.445,52.75 cw(c11.445,51.988) 12.207,51.988 12.207,45.892 cw(c11.445,45.892) 11.445,45.13 2.555,45.13 cw(c2.555,45.892) 1.793,45.892

## Silkscreen, mask and mechanical layers (free items; w line width, h text height)
Top Overlay:
  lines w0.254: 1.5,24 5,24 ; 1.5,20 5,20 5,27 1.5,27 1.5,20
  text "CANL" at 3.5,53 h0.76 r90
  text "CANH" at 6,53 h0.76 r90
  text "GND" at 8.75,53 h0.76 r90
  text "12V" at 11.25,53 h0.76 r90
  text "12V" at 18.222,29.637 h0.76
  text "3V3" at 18.15,28 h0.76
  text "INFO" at 17.421,26.561 h0.76
  text "DIO" at 2.5,24.5 h0.76 r90
  text "CLK" at 3.5,24.5 h0.76 r90
  text "SWO" at 4.5,24.5 h0.76 r90
  text "VDD" at 2.5,20.5 h0.76 r90
  text "GND" at 3.5,20.5 h0.76 r90
  text "NRST" at 4.5,20.5 h0.76 r90
  text "GND" at 1.556,5.04 h0.76 r90
  text "AGND" at 6,3 h0.76 r90
  text "3V3" at 8.75,3 h0.76 r90
  text "12V" at 11.25,3 h0.76 r90
  text "SUSP" at 14.5,3 h0.76 r90
  text "WS+" at 17,3 h0.76 r90
  text "SDA" at 19.75,3 h0.76 r90
  text "SCL" at 22.25,3 h0.76 r90
Bottom Overlay:
  drawing of 1214 lines, arcs and shapes, not listed
  text "CANL" at 3.5,55.75 h0.76 r90
  text "CANH" at 6,55.75 h0.76 r90
  text "GND" at 8.75,55.75 h0.76 r90
  text "12V" at 11.25,55.75 h0.76 r90
  text "Rev 1.0" at 11,44 h1.52 r90
  text "Wheel Module" at 14,44 h1.52 r90
  text "GND" at 1.5,7 h0.76 r90
  text "AGND" at 6,6 h0.76 r90
  text "3V3" at 8.75,6 h0.76 r90
  text "12V" at 11.25,6 h0.76 r90
  text "SUSP" at 14.5,6 h0.76 r90
  text "WS+" at 17,6 h0.76 r90
  text "SDA" at 19.75,6 h0.76 r90
  text "SCL" at 22.25,6 h0.76 r90
Drill Drawing:
  circle w0.254: c2.556,73.3 r0.847
  lines w0.254: 1.709,70.337 3.403,70.337 2.556,68.644 1.709,70.337
  lines w0.381: 0.191,67.501 278.091,67.501 ; 0.191,75.12 278.091,75.12 ; 14.183,63.691 14.183,78.93 ; 29.419,63.691 29.419,78.93 ; 57.351,63.691 57.351,78.93 ; 70.2,63.691 70.2,78.93 ; 88.838,63.691 88.838,78.93 ; 126.927,63.691 126.927,78.93 ; 141.909,63.691 141.909,78.93 ; 160.852,63.691 160.852,78.93 ; 187.515,63.691 187.515,78.93 ; 209.2,63.691 209.2,78.93 ; 243.074,63.691 243.074,78.93 ; 0.191,63.691 278.091,63.691 278.091,78.93 0.191,78.93 0.191,63.691
  text "Symbol" at 2.476,76.263 h1.83
  text "Count" at 15.326,76.263 h1.83
  text "Hole Size" at 30.562,76.263 h1.83
  text "Plated" at 58.494,76.263 h1.83
  text "Hole Type" at 71.343,76.263 h1.83
  text "Drill Layer Pair" at 89.981,76.263 h1.83
  text "Via/Pad" at 128.07,76.263 h1.83
  text "Pad Shape" at 143.052,76.263 h1.83
  text "Template" at 161.995,76.263 h1.83
  text "Description" at 188.658,76.263 h1.83
  text "Hole Tolerance (+)" at 210.343,76.263 h1.83
  text "Hole Tolerance (-)" at 244.217,76.263 h1.83
  text "2" at 15.326,72.453 h1.52
  text "88.58mil (2.250mm)" at 30.562,72.453 h1.52
  text "PTH" at 58.494,72.453 h1.52
  text "Round" at 71.343,72.453 h1.52
  text "Top Layer - Bottom Layer" at 89.981,72.453 h1.52
  text "Pad" at 128.07,72.453 h1.52
  text "Rounded" at 143.052,72.453 h1.52
  text "c380h225m380p380" at 161.995,72.453 h1.52
  text "420" at 15.326,68.644 h1.52
  text "11.81mil (0.300mm)" at 30.562,68.644 h1.52
  text "PTH" at 58.494,68.644 h1.52
  text "Round" at 71.343,68.644 h1.52
  text "Top Layer - Bottom Layer" at 89.981,68.644 h1.52
  text "Via" at 128.07,68.644 h1.52
  text "Rounded" at 143.052,68.644 h1.52
  text "(Mixed)" at 161.995,68.644 h1.52
  text "(Mixed)" at 188.658,68.644 h1.52
  text "422 Total" at 15.326,64.834 h1.52

## Dimensions
3,0 to 3,60 on Mechanical 15
0,3 to 25,3 on Mechanical 15